# EAGLE board MySens-GWeasyRS485-Nano-V11-008 (EAGLE 7.6.0)
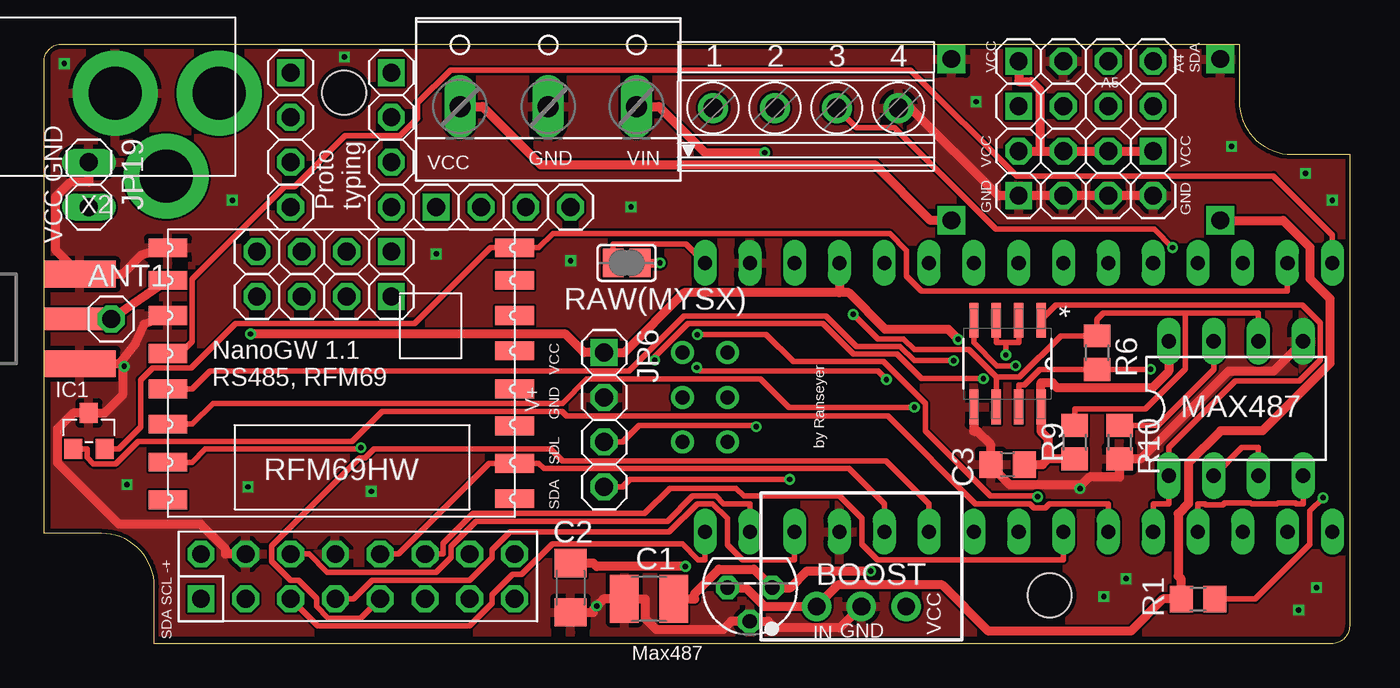
[diagram p0: board, top side]
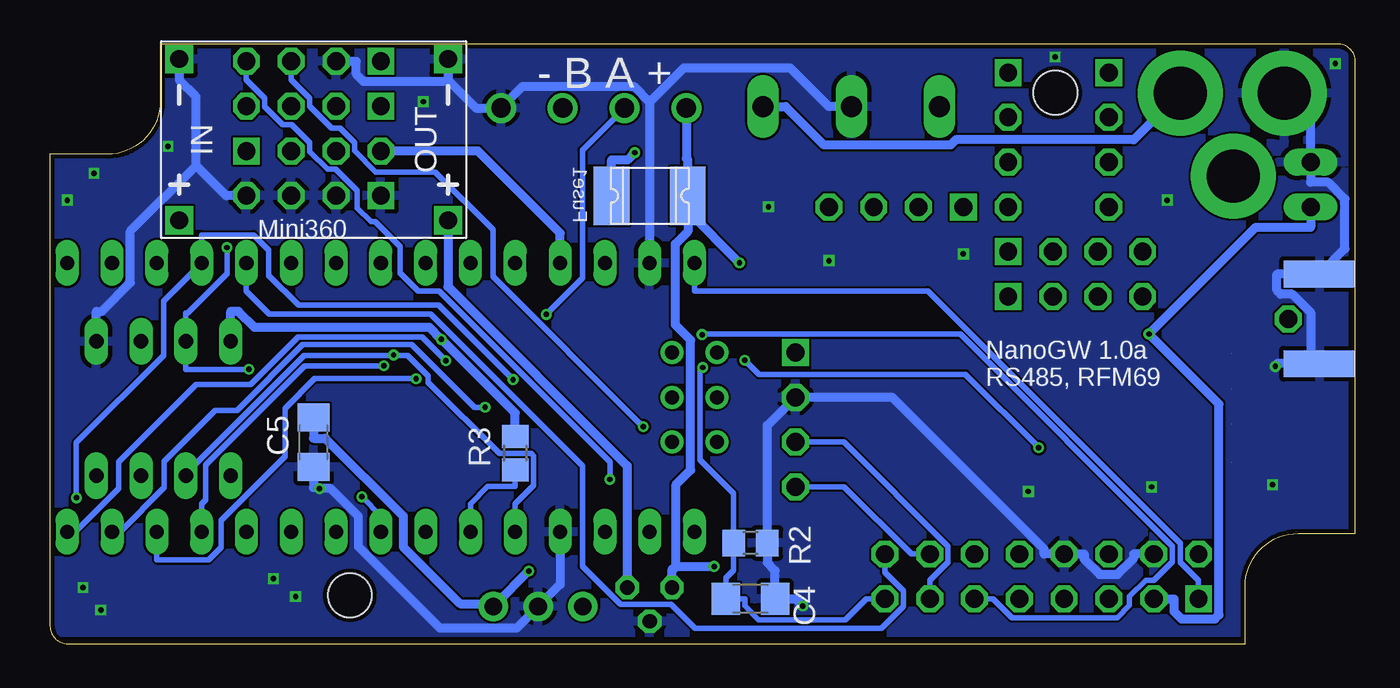
[diagram p1: board, bottom side, seen from below]

Size 74 x 34 mm. Coordinates in mm from the lower left corner, seen from the top.
Outline: 0,6.25 0,33 arc-90 1,34 67.75,34 67.75,30.75 arc90 70.75,27.75 74,27.75 74,1 arc-90 73,0 6.25,0 6.25,3.25 arc90 3.25,6.25 0,6.25
Copper layers (1*16): Top 0.035mm / dielectric 1.5mm / Bottom 0.035mm
Design rules "dirt_cheap_dirty_boards.v1": minimum track width 5mil, minimum drill 12mil, track to track 5mil, track to pad 5mil, pad to pad 5mil, via to via 5mil, smd to smd 0mil, copper to edge 10mil, drill to drill 10mil, minimum pad ring 10mil, minimum via ring 6mil, stop-mask expansion 2mil, vias tented up to drill 25mil, thermal gap 10mil
Net classes: 0 default: width 0.305 mm; 1 Power: width 0.508 mm
Holes 2.5 mm at 57,2.75 17,31.25

## Footprints (pad centres in the part's own frame; a part is rotated, then mirrored left to right if it is on the bottom)
1X01 = drill 1.016 octagon: 1 0,0
SIP3 = drill 1 pad 1.676: 1 -2.54,0; 2 0,0; 3 2.54,0
C1210 = smd 1.6 x 2.7: 1 -1.4,0; 2 1.4,0
C1206 = smd 1.6 x 1.8: 1 -1.4,0; 2 1.4,0
C0805 = smd 1.3 x 1.5: 1 -0.95,0; 2 0.95,0
1812L = smd 2.03 x 3.3: P$1 -2.16,0; P$2 2.16,0
SOT23 = smd 1.016 x 1.143: 1 -0.889,-1.016; 2 0.889,-1.016; 3 0,1.016
1X04-S = drill 1.016 square: 1 -3.81,0 | drill 1.016 octagon: 2 -1.27,0; 3 1.27,0; 4 3.81,0
1X02 = drill 1.016 long: 1 -1.27,0; 2 1.27,0
DIL08 = drill 0.813 long: 1 -3.81,-3.81; 2 -1.27,-3.81; 3 1.27,-3.81; 4 3.81,-3.81; 5 3.81,3.81; 6 1.27,3.81; 7 -1.27,3.81; 8 -3.81,3.81
2X08 = drill 1.016 square: 1 -8.89,-1.27 | drill 1.016 octagon: 2 -8.89,1.27; 3 -6.35,-1.27; 4 -6.35,1.27; 5 -3.81,-1.27; 6 -3.81,1.27; 7 -1.27,-1.27; 8 -1.27,1.27; 9 1.27,-1.27; 10 1.27,1.27; 11 3.81,-1.27; 12 3.81,1.27; 13 6.35,-1.27; 14 6.35,1.27; 15 8.89,-1.27; 16 8.89,1.27
R0805 = smd 1.3 x 1.5: 1 -0.95,0; 2 0.95,0
SJ = smd 1.168 x 1.6: 1 -0.762,0; 2 0.762,0
TO92 = drill 0.813 octagon: 1 -1.27,0; 2 0,1.905; 3 1.27,0
DC-DC-STEP-DOWN-MP2307 = drill 1 pad 1.6 square: IN+ -7.62,-4.572; IN- -7.62,4.572; OUT+ 7.62,-4.572; OUT- 7.62,4.572
W237-103 = drill 1.194 long: 1 -5,-1.29; 2 0,-1.29; 3 5,-1.29
RFM = smd 2.184 x 1.067: ANT 19.651,2.889; DIO0 0,13.27; DIO1 0,11.143; DIO2 0,9.047; DIO3 0,6.889; DIO4 0,4.889; DIO5 0,2.889; GNDA 19.651,4.889; GNDB 19.651,1.048; MISO 19.651,9.047; MOSI 19.651,11.047; NC 19.651,15.334; NSS 19.651,13.206; RESET 0,15.27; SCK 19.651,7.048; VCC 0,1.048
SOIC127P600X175-8N = smd 1.981 x 0.533: 1 -2.464,1.905; 2 -2.464,0.635; 3 -2.464,-0.635; 4 -2.464,-1.905; 5 2.464,-1.905; 6 2.464,-0.635; 7 2.464,0.635; 8 2.464,1.905
NANO = drill 0.8 long: 3.3V -10.16,24.13; 5V -10.16,-1.27; A0 -10.16,19.05; A1 -10.16,16.51; A2 -10.16,13.97; A3 -10.16,11.43; A4 -10.16,8.89; A5 -10.16,6.35; A6 -10.16,3.81; A7 -10.16,1.27; AREF -10.16,21.59; D2 5.08,1.27; D3 5.08,3.81; D4 5.08,6.35; D5 5.08,8.89; D6 5.08,11.43; D7 5.08,13.97; D8 5.08,16.51; D9 5.08,19.05; D10 5.08,21.59; D11 5.08,24.13; D12 5.08,26.67; D13 -10.16,26.67; GND -10.16,-6.35; GND1 5.08,-1.27; RAW -10.16,-8.89; RST -10.16,-3.81; RST1 5.08,-3.81; RX1 5.08,-6.35; TX0 5.08,-8.89 | drill 0.8: ICSP1 -5.08,-10.16; ICSP2 -5.08,-7.62; ICSP3 -2.54,-10.16; ICSP4 -2.54,-7.62; ICSP5 0,-10.16; ICSP6 0,-7.62
PJ-102A = drill 3 pad 4.8: RING 0.1,-3.39; RING_SW -4.6,-6.29; TIP 0.1,-9.29
SMA_EDGELAUNCH = smd 4.064 x 1.524: GND@1 2.032,-2.54; GND@2 2.032,2.54 | smd 4.064 x 1.524 bottom: GND@3 2.032,2.54; GND@4 2.032,-2.54 | smd 4.064 x 1.27: P 2.032,0
1751264 = drill 1.1 pad 1.7: 1 -5.25,-0.1; 2 -1.75,-0.1; 3 1.75,-0.1; 4 5.25,-0.1

## Placement (x,y rotation side)
ANT1  [1X01]  3.81,18.41 0 top
BOOST  R-78C1.8-1.0  [SIP3]  46.33,2.11 0 top
C1  10uF  [C1210]  34.29,2.54 180 top
C2  0.1uF  [C1206]  29.84,3.17 270 top
C3  22p  [C0805]  54.61,10.16 0 top
C4  0,1uF  [C1206]  34.29,2.54 180 bottom
C5  (0.1uF)  [C1206]  59.05,11.43 90 bottom
F1  1812L  [1812L]  40.01,25.4 180 bottom
IC1  ATSHA204A  [SOT23]  2.54,12.06 0 top
JP1  [1X04-S]  59.05,25.4 0 top
JP3  [1X04-S]  59.05,27.94 180 top
JP6  [1X04-S]  31.75,12.7 270 top
JP10  [1X04-S]  59.05,33.02 0 top
JP11  [1X04-S]  15.88,19.68 180 top
JP12  [1X04-S]  13.97,28.57 270 top
JP13  [1X04-S]  15.88,22.23 180 top
JP14  [1X04-S]  26.04,24.77 0 top
JP15  [1X04-S]  59.05,30.48 0 top
JP16  [1X04-S]  19.68,28.57 270 top
JP19  [1X02]  2.54,26.04 270 top
MAX487  MAX481CPA  [DIL08]  67.56,13.34 0 top
MYSX  [2X08]  17.78,3.81 0 top
R1  1M  [R0805]  65.41,2.54 0 top
R2  470K  [R0805]  34.29,5.71 180 bottom
R3  [R0805]  47.62,10.79 270 bottom
R6  150R  [R0805]  59.69,16.51 270 top
R9  330R  [R0805]  58.42,11.43 90 top
R10  330R  [R0805]  60.96,11.43 270 top
RAW(MYSX)  [SJ]  33.02,21.59 180 top
REG1  LP2950Z  [TO92]  40.01,3.17 180 top
REG2  STEP-DWN-MP2307  [DC-DC-STEP-DOWN-MP2307]  59.05,28.57 0 bottom
REGULATED  [W237-103]  28.57,31.75 0 top
RFM69W  RFM69HW  [RFM]  26.67,23.5 180 top
RS1  MAX487ECSA+  [SOIC127P600X175-8N]  54.61,15.88 270 top
U$2  NANO  [NANO]  46.35,11.43 270 top
U$3  2.1MMJACKTHM  [PJ-102A]  0.64,31.11 90 top
X2  [SMA_EDGELAUNCH]  0,18.41 0 top
X7  1751264  [1751264]  43.18,30.48 0 top

## Library data of the parts
ANT1 JP19 = pinhead
BOOST = dc-dc-converter
C1-C5 R1-R3 R6 R9 R10 = rcl
F1 = ptc-littlefuse
IC1 = Sensor
JP1 JP3 JP6 JP10-JP16 MYSX = pinhead-2
MAX487 = maxim-4
RAW(MYSX) = jumper
REG1 = linear
REG2 = diy-modules
REGULATED = con-wago-500; MPN: 237-103; OC_FARNELL: unknown; OC_NEWARK: 18M7116
RFM69W = hoperf
RS1 = Maxim_By_element14_Batch_1; MPN: MAX487ECSA+; OC_FARNELL: 9724532; OC_NEWARK: 68K4803; PACKAGE: SOIC-8; SUPPLIER: Maxim
U$2 = Arduino-clone
U$3 X2 = adafruit
X7 = con-phoenix-350; MPN: 1751264; OC_FARNELL: unknown; OC_NEWARK: 10R0934

## Nets
3.3V [Power]: MYSX.2
3V3: IC1.2 RFM69W.VCC U$2.3.3V
A: MAX487.6 R6.1 R9.2 RS1.6 X7.2
A0: C4.2 MYSX.15 R1.2 R2.2 U$2.A0
A1: MYSX.16 U$2.A1
A4: JP6.4 JP10.4 MYSX.14
A5: JP6.3 JP10.3 MYSX.13
B: MAX487.7 R6.2 R10.1 RS1.7 X7.3
CSN: RFM69W.NSS U$2.D10
D3: MYSX.9 R3.2 U$2.D3
D4: U$2.D4
D5: MYSX.11 U$2.D5
D6: MYSX.12 U$2.D6
D7: IC1.1 U$2.D7
D8: MAX487.1 RS1.1 U$2.D8
D9: MAX487.4 RS1.4 U$2.D9
GND [Power]: BOOST.2 C1.2 C2.2 C3.1 C4.1 C5.1 IC1.3 JP1.1 JP1.2 JP1.3 JP1.4 JP6.2 JP10.2 JP19.1 MAX487.5 MYSX.4 MYSX.8 R2.1 R10.2 REG1.2 REG2.IN- REG2.OUT- REGULATED.2 RFM69W.GNDA RFM69W.GNDB RS1.5 U$2.GND U$2.GND1 U$3.RING X2.GND@1 X2.GND@2 X2.GND@3 X2.GND@4 X7.4
IN [Power]: BOOST.1 C2.1 F1.P$1 R1.1 RAW(MYSX).1 REG1.3 REG2.IN+ X7.1
IRQ: MAX487.2 MAX487.3 MYSX.10 RFM69W.DIO0 RS1.2 RS1.3 U$2.D2
MISO: RFM69W.MISO U$2.D12
MOSI: RFM69W.MOSI U$2.D11
N$16: ANT1.1 RFM69W.ANT X2.P
N$20: U$2.AREF
N$24: U$2.A2
N$25: U$2.A3
N$26: U$2.A4
N$27: U$2.A5
N$28: U$2.A6
N$29: U$2.A7
N$31: U$2.RST
OUT [Power]: BOOST.3 C1.1 C5.2 REG1.1 REG2.OUT+ REGULATED.1
RESET: MYSX.7 U$2.RST1
RW: MYSX.1 RAW(MYSX).2 U$2.RAW
RX: MYSX.6 U$2.RX1
SCK: RFM69W.SCK U$2.D13
TX: MYSX.5 U$2.TX0
VCC [Power]: C3.2 JP3.1 JP3.2 JP3.3 JP3.4 JP6.1 JP10.1 JP19.2 MAX487.8 MYSX.3 R3.1 R9.1 RS1.8 U$2.5V
VIN [Power]: F1.P$2 REGULATED.3 U$3.TIP

## Tracks (layer width: path | path; a pad name or v marks a point on that pad's centre or on a via)
3V3
  Top 0.305: U$2.3.3V 70.48,20 49.73,20 48.9,20.84 48.9,22.3 47.95,23.25 28.84,23.25 28.04,22.45 RFM69W.VCC 25.3,22.45 20.99,18.14 10.86,18.14 8.35,15.63 6.15,15.63 5.47,14.95 5.47,12.3 4.22,11.05 IC1.2
A  (via drill 0.3 pad 0.61)
  Top 0.305: 64.7,18.75 68.83,18.75 MAX487.6 | 64.7,18.75 60.05,18.75 59.69,18.39 R6.1 57.63,17.46 55.29,15.13 53.98,15.13 | 64.7,18.75 64.7,15.59 62.42,13.31 58.42,13.31 R9.2 | 53.98,15.13 52.44,16.67 49.32,16.67 48.7,17.29 47.25,17.29 v45.87,18.67 | RS1.6 53.98,15.13
  Bottom 0.305: X7.2 43.81,28 43.81,20.73 v45.87,18.67
A0  (via drill 0.3 pad 0.61)
  Top 0.305: v47.75,14.98 47.27,15.45 37.2,15.45 v37,15.66 | v72.5,8.27 71.75,7.52 71.75,5.62 68.67,2.54 R1.2
  Bottom 0.305: 51.96,19.19 59.92,19.19 61.59,20.87 61.59,22.31 62.46,23.18 65.41,23.18 U$2.A0 67.56,19.43 67.56,16.34 72.5,11.4 v72.5,8.27 | 51.96,19.19 | 51.96,19.19 v47.75,14.98 | v37,15.66 37.16,15.5 37.16,10.43 35.24,8.51 R2.2 35.24,4.17 35.69,3.72 C4.2 34.61,2.54 34.61,2.13 33.83,1.35 28.9,1.35 27.71,2.54 MYSX.15
A1
  Bottom 0.305: MYSX.16 26.67,4.04 25.63,3 25.63,2.1 26.86,0.87 37.43,0.87 38.79,2.23 41.66,2.23 43.81,4.39 43.81,10.09 52.43,18.71 61.57,18.71 62.87,20 U$2.A1
A4  (via drill 0.3 pad 0.61)
  Top 0.305: JP6.4 32.79,8.89 33.21,9.31 v42.26,9.31
  Bottom 0.305: v42.26,9.31 42.26,10.32 51.95,20 53.13,20 54.15,21.02 54.15,22.51 55.56,23.92 55.8,23.92 56.59,24.71 56.59,25.69 57.8,26.9 58.27,26.9 59.28,27.91 59.28,28.41 60.31,29.44 60.8,29.44 61.82,30.46 61.82,30.94 62.87,31.98 JP10.4 | MYSX.14 25.17,5.08 28.98,8.89 JP6.4
A5  (via drill 0.3 pad 0.61)
  Top 0.305: JP6.3 32.79,11.43 33.73,12.36 40.31,12.36 v40.37,12.3
  Bottom 0.305: JP10.3 60.33,31.98 59.28,30.94 59.28,30.48 58.03,29.22 57.54,29.22 56.74,28.43 56.74,27.95 55.53,26.75 52.16,26.75 48.9,23.48 48.9,20.82 v40.37,12.3 | MYSX.13 24.13,3.58 23.09,4.62 23.09,5.52 29,11.43 JP6.3
B  (via drill 0.3 pad 0.61)
  Top 0.305: RS1.7 55.24,14.68 55.58,14.68 56.46,15.56 R6.2 v62.72,15.56 | MAX487.7 66.29,15.54 63.13,12.38 R10.1 | X7.3 46.06,29.25 48.22,29.25 53.96,23.51 62.93,23.51 v63.97,22.46
  Bottom 0.305: v62.72,15.56 62.74,15.54 66.29,15.54 MAX487.7 66.29,18.75 66.2,18.75 63.97,20.98 v63.97,22.46
CSN  (via drill 0.3 pad 0.61)  (1 unrouted)
  Top 0.305: v53.24,15.03 49.74,15.03 48.35,16.42 45.87,16.42 44.15,18.15 36.51,18.15 34.61,16.25 v34.61,16.07 | RFM69W.NSS 8.39,10.29 9.14,11.04 17.87,11.04 v17.95,11.12
  Bottom 0.305: v17.95,11.12 22.1,15.27 33.81,15.27 | 33.81,15.27 | 33.81,15.27 v34.61,16.07 | U$2.D10 67.94,4.76 65,4.76 64.29,5.47 64.29,7 60.67,10.62 60.67,13.35 58.99,15.03 v53.24,15.03
D3
  Top 0.305: U$2.D3 50.16,7.94 47.73,10.37 29.38,10.37 28.71,11.04 18.7,11.04 18.19,10.54 17.9,10.54 12.91,5.55 12.91,4.67 13.99,3.59 14.43,3.59 15.44,2.57 15.44,2.11 16.11,1.45 17.96,1.45 MYSX.9
  Bottom 0.305: R3.2 47.62,8.91 49.19,8.91 50.16,7.94 U$2.D3
D5  (via drill 0.3 pad 0.61)
  Top 0.305: v56.31,8.33 56.27,8.37 53.63,8.37 49.95,12.05 49.95,13.63 47.59,15.99 42.47,15.99 40.93,17.53 v37.03,17.53
  Bottom 0.305: MYSX.11 20.55,2.54 19.48,1.48 13.51,1.48 12.82,2.16 12.82,2.68 11.89,3.6 11.42,3.6 10.38,4.65 10.38,5.53 22.4,17.55 37.01,17.55 v37.03,17.53 | U$2.D5 55.24,7.26 v56.31,8.33
D6
  Top 0.305: MYSX.12 22.63,5.08 22.63,5.69 24.32,7.38 34.05,7.38 35.47,8.8 39.23,8.8 39.66,8.37 45.08,8.37 46.35,7.09 46.35,5.64 47.23,4.76 57.78,4.76 U$2.D6
D7
  Top 0.305: U$2.D7 60.33,7.94 56.99,7.94 56.76,7.7 56.12,7.7 55.88,7.94 52.81,7.94 47.83,12.91 29.61,12.91 29.36,13.16 19.17,13.16 17.48,11.47 5.33,11.47 4.05,10.2 2.8,10.2 2.44,10.56 2.44,11.05 IC1.1
D8
  Top 0.305: U$2.D8 62.87,7.94 63.25,7.94 63.26,7.92 63.75,7.92 MAX487.1 63.75,11.12 67.54,14.91 71.15,14.91 72.33,16.09 72.33,18.19 71.33,19.19 57.37,19.19 RS1.1
D9  (via drill 0.3 pad 0.61)
  Top 0.305: RS1.4 52.7,17.07 54.02,15.75 v55.07,15.75 | U$2.D9 65.41,7.94 65.79,7.94 65.86,7.87 66.82,7.87 66.94,7.99 68.38,7.99 68.45,7.92 69.88,7.92 69.95,7.99 70.92,7.99 70.98,7.92 71.37,7.92 MAX487.4
  Bottom 0.305: U$2.D9 65.41,7.94 65.18,8.17 65.18,10.14 59.56,15.75 v55.07,15.75
GND  (via drill 0.3 pad 0.61)
  Top 0.508: BOOST.2 45.11,0.89 41.43,0.89 41.05,1.27 REG1.2 38.96,1.27 38.5,0.81 34.7,0.81 34.07,1.43 34.07,2.54 C4.1 31.71,2.54 31.71,2.52 v31.32,2.13 31.13,1.93 31.13,1.77 C2.2 | MYSX.4 10.29,5.08 10.29,5.37 8.88,6.77 4.25,6.77 0.76,10.26 0.76,12.19 1.65,13.08 IC1.3 3.43,13.08 4.45,14.1 4.45,15.72 | 4.29,15.88 4.45,15.72 | 4.29,15.88 3.24,15.88 X2.GND@1 | 4.29,15.88 5.16,17 5.67,18.1 RFM69W.GNDA | 4.45,15.72 v4.54,15.72 | RS1.5 52.7,12.04 52.91,12.04 53.66,11.29 C3.1 53.66,10.09 54.72,9.03 58.6,9.03 58.72,8.91 | JP19.1 2.54,26.16 1.48,26.16 0.64,25.32 0.64,22.35 X2.GND@2 4.45,20.95 5.54,22.05 6.43,22.32 RFM69W.GNDB | JP1.4 JP1.3 JP1.2 JP1.1 54.1,25.4 49.12,30.38 X7.4 | 58.72,8.91 59.26,9.45 60.96,9.45 R10.2 62.17,10.48 67.13,15.44 69.67,15.44 MAX487.5 | 58.72,8.91 v58.72,8.79
  Bottom 0.508: 40.01,30.71 U$2.GND | 40.01,30.71 40.9,31.61 47.2,31.61 X7.4 49.85,30.38 51.44,31.97 | 40.01,30.71 38.07,32.65 32.04,32.65 29.85,30.46 REGULATED.2 | JP10.2 56.64,33.02 56.64,32.3 56.22,31.88 51.52,31.88 51.44,31.97 | REG2.IN- 66.67,31.97 65.72,31.01 65.72,27.11 | MAX487.5 71.37,18.85 71.06,18.85 69.44,20.47 69.44,23.39 65.72,27.11 | MYSX.4 12.57,5.08 12.57,4.84 13.49,3.92 14.49,3.92 15.37,4.79 15.37,5.08 MYSX.8 17.65,5.08 17.65,5.37 26.25,13.97 JP6.2 | 2.51,15.88 2.51,18.74 3.58,19.81 4.23,19.81 4.45,20.03 4.45,20.95 X2.GND@2 0.6,22.39 0.6,25.22 1.54,26.16 2.54,26.16 JP19.1 2.54,29.73 U$3.RING | 2.51,15.88 4.45,15.88 4.45,15.82 v4.54,15.72 | X2.GND@1 2.51,15.88 | C5.1 59.05,8.85 58.77,8.85 v58.72,8.79 58.1,8.79 56.52,7.21 56.52,5.5 51.89,0.88 47.56,0.88 BOOST.2 45.09,3.35 U$2.GND1 | JP1.4 64.01,25.4 65.72,27.11 | JP6.2 33.34,12.38 R2.1 33.34,4.58 32.89,4.13 C4.1 31.71,2.54 31.71,2.52 v31.32,2.13 | REG2.OUT- 51.44,31.97 | JP6.2
  other vias: 10.67,25.15 4.7,9.02 11.56,8.89 18.54,8.64 22.23,22.1 29.84,21.72 33.27,24.77 17.02,33.27 1.14,32.89 60.07,2.67 61.34,3.68 71.12,1.91 72.14,3.17 73.03,25.15 71.5,26.67 67.31,28.19 52.83,30.73
  pour Bottom: 0.64,34.29 73.66,34.29 74.3,0.64 0.64,0.64
  pour Top: 0.64,34.29 73.66,34.29 74.3,0.64 0.64,0.64
IN  (via drill 0.3 pad 0.61)
  Top 0.508: v34.92,21.59 34.75,21.59 RAW(MYSX).1 | C2.1 31.13,4.58 31.32,4.38 v36.35,4.38 | REG1.3 39.78,3.17 40.84,2.11 BOOST.1 45.01,3.33 50.91,3.33 53.53,0.71 61.59,0.71 63.42,2.54 R1.1 64.45,3.67 64.3,3.83 64.3,7.37 64.87,7.95 64.87,10.24 66.7,12.07 69.07,12.07 72.89,15.89 72.89,19.57 71.75,20.7 71.75,22.49 70.24,24 REG2.IN+
  Bottom 0.508: 38.5,4.38 38.5,9.04 37.69,9.85 37.69,17.21 38.55,18.07 38.55,22.67 37.84,23.37 37.84,24.52 | X7.1 37.93,27.52 37.84,27.43 F1.P$1 37.84,24.52 | 37.84,24.52 v34.92,21.59 | 38.5,4.38 v36.35,4.38 | 38.5,4.38 38.66,4.22 38.73,4.22 REG1.3
IRQ  (via drill 0.3 pad 0.61)
  Top 0.305: 54.52,17.07 55.24,17.07 RS1.2 | 54.52,17.07 53.98,17.07 RS1.3 | v54.52,16.37 54.52,17.07 | MAX487.3 68.83,11.12 67.89,11.12 MAX487.2 | MYSX.10 20.09,5.08 25.24,10.22 RFM69W.DIO0 28.04,10.22 28.33,9.94 45.63,9.94 47.62,7.94 U$2.D2
  Bottom 0.305: 54.52,16.34 59.59,16.34 66.29,9.63 MAX487.2 | 54.52,16.34 53.72,16.34 52.56,15.18 52.56,14.82 48.51,10.77 46.71,10.77 46.59,10.66 46.59,8.97 47.62,7.94 U$2.D2 | 54.52,16.34 v54.52,16.37
MISO  (via drill 0.3 pad 0.61)  (1 unrouted)
  Top 0.305: v51.56,16.04 49.34,16.04 48.52,16.86 46.05,16.86 44.33,18.58 36.28,18.58 33.16,15.46 9.4,15.46 8.39,14.45 RFM69W.MISO
  Bottom 0.305: U$2.D12 72.56,6.35 70.1,8.8 70.1,10.3 65.72,14.69 62.62,14.69 59.92,17.38 52.9,17.38 v51.56,16.04
MOSI  (via drill 0.3 pad 0.61)  (1 unrouted)
  Top 0.305: v49.34,13.4 42.22,13.4 40.6,15.02 30.76,15.02 29.38,13.63 9.58,13.63 8.39,12.45 RFM69W.MOSI
  Bottom 0.305: U$2.D11 70.02,6.35 67.52,8.85 67.52,10.34 64.64,13.22 63.39,13.22 59.66,16.95 53.49,16.95 49.94,13.4 v49.34,13.4
N$16
  Top 0.305: X2.P ANT1.1
  Top 0.508: RFM69W.ANT ANT1.1
OUT  (via drill 0.3 pad 0.61)
  Top 0.508: REG2.OUT+ 50.25,24 47.1,27.16 28.15,27.16 24.85,30.46 REGULATED.1 | C1.1 36.87,2.54 36.87,2.83 38.26,4.22 40.23,4.22 REG1.1 42.32,3.17 43.26,4.12 v46.86,4.12
  Bottom 0.508: REG2.OUT+ 51.44,20.25 41.27,10.09 REG1.1 | C5.2 59.05,11.65 58.39,11.65 53.98,7.23 53.98,5.5 50.74,2.27 48.87,2.27 | BOOST.3 48.87,2.27 | v46.86,4.12 48.71,2.27 48.87,2.27
RESET
  Top 0.305: MYSX.7 17.55,2.54 18.6,3.59 24.12,3.59 25.4,4.87 25.4,5.32 26.41,6.33 35.42,6.33 37.03,7.94 37.89,7.94 38.73,7.09 38.73,5.61 39.58,4.76 42.55,4.76 U$2.RST1
RW
  Top 0.305: RAW(MYSX).2 32.26,22.67 36.38,22.67 U$2.RAW
  Bottom 0.305: MYSX.1 8.89,3.58 9.93,4.62 9.93,5.7 24.24,20 37.47,20 U$2.RAW
RX
  Top 0.305: MYSX.6 15.01,5.08 16.05,4.04 22.21,4.04 23.06,4.89 23.06,5.51 24.5,6.95 35.35,6.95 36.77,8.37 38.09,8.37 38.52,7.94 40.01,7.94 U$2.RX1
SCK  (1 unrouted)
  Top 0.305: RFM69W.SCK 7.71,16.45 8.39,17.13 8.39,20.66 13.64,25.91 14.19,25.91 17.07,28.8 20.18,28.8 21.18,29.8 21.18,30.67 23.05,32.53 49.12,32.53 55.13,26.52 69.69,26.52 73.03,23.18 U$2.D13
TX
  Top 0.305: U$2.TX0 37.47,4.76 37.08,4.76 36.18,5.66 28.81,5.66 27.07,3.93 26.56,3.93 25.4,2.77 25.4,2.29 24.12,1.01 15.5,1.01 MYSX.5
VCC  (via drill 0.3 pad 0.61)
  Top 0.508: MAX487.8 63.75,15.44 62.82,14.51 57.43,14.51 57.16,14.78 56.52,14.78 56.52,13.94 RS1.8 56.52,12.04 56.91,11.64 56.91,10.48 | 56.91,10.48 56.59,10.16 C3.2 | 56.91,10.48 57.45,10.48 R9.1 | v51.82,17.25 51.25,17.82 47.69,17.82 45.61,19.9 45.09,19.9 | v11.7,17.56 29.56,17.56 30.61,16.51 JP6.1 32.32,16.51 32.89,16.51 36.28,19.9 45.09,19.9 | JP10.1 55.24,31.88 55.96,31.88 56.45,31.39 56.45,27.94 | JP3.4 56.45,27.94 | 56.45,27.94 JP3.3 JP3.2 JP3.1 | U$2.5V 45.09,19.9
  Bottom 0.508: U$2.5V 45.09,23.28 49.75,27.94 JP3.4 | MAX487.8 63.75,18.85 63.32,18.85 62.41,17.93 52.49,17.93 v51.82,17.25 51.8,17.25 47.62,13.07 R3.1 | MYSX.3 10.29,2.54 10.29,1.83 9.86,1.4 7.96,1.4 7.73,1.63 7.73,13.58 v11.7,17.56 5.64,23.62 2.54,23.62 JP19.2
VIN  (via drill 0.3 pad 0.61)
  Top 0.508: REGULATED.3 34.85,30.46 37.47,27.85 v40.85,27.85
  Bottom 0.508: REGULATED.3 32.3,30.46 30.11,28.28 22.95,28.28 22.65,28.57 12.56,28.57 U$3.TIP | F1.P$2 42.16,27.43 41.27,27.43 v40.85,27.85

## Text on the board
tPlace: by Ranseyer
tNames: VCC | - | A5 | A4 / SDA | VCC | VCC | VCC | GND | VIN | GND | GND | Proto / typing | VCC GND | NanoGW 1.1 / RS485, RFM69 | V+ | VCC | GND | SDL | SDA | VCC | IN | GND | SDA SCL -+ | Max487
bNames: - B A + | Fuse1 | Mini360 | NanoGW 1.0a / RS485, RFM69